# Altium PCB Digital temperature sensor.PcbDoc
Units mm, origin at the board's own origin, x right, y up, seen from the top; angles counter-clockwise.
Board outline 55 x 35 mm, 2 copper layers (Top Layer, Bottom Layer), stack 1.65 mm thick; 7 components, 6 nets, 27 pads, 0 vias.
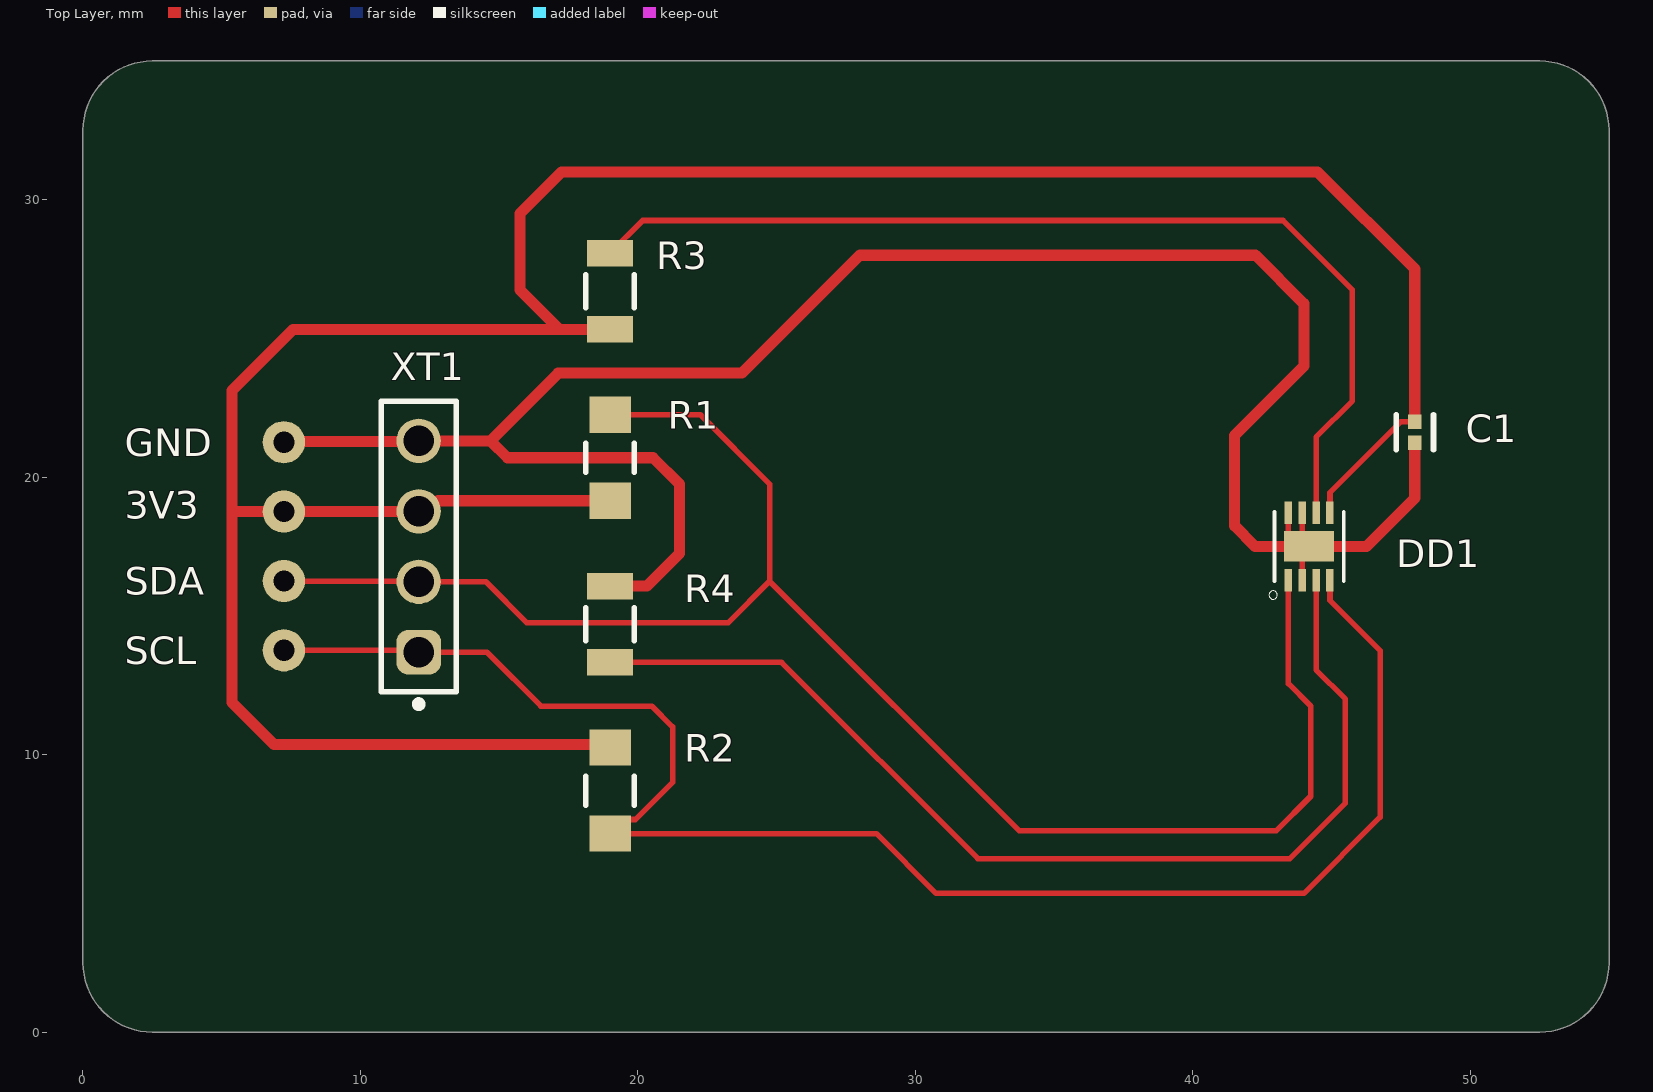
[diagram p0: Top Layer view]
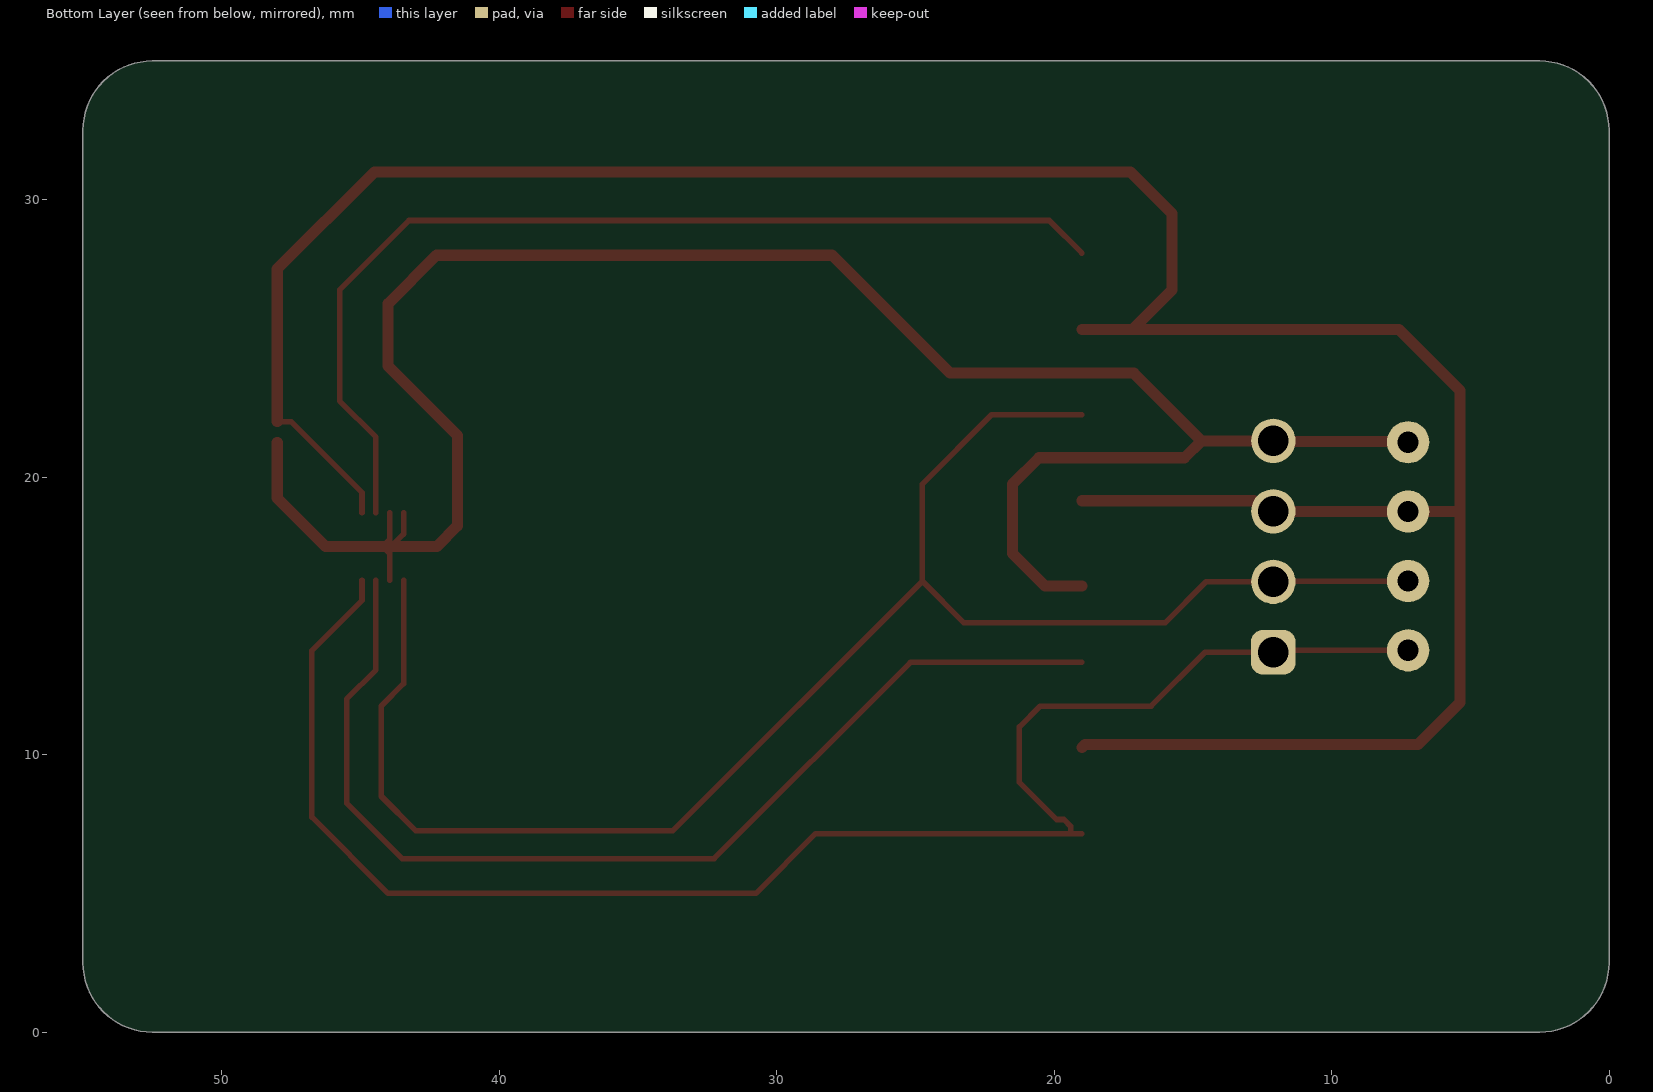
[diagram p1: Bottom Layer view, seen from below]
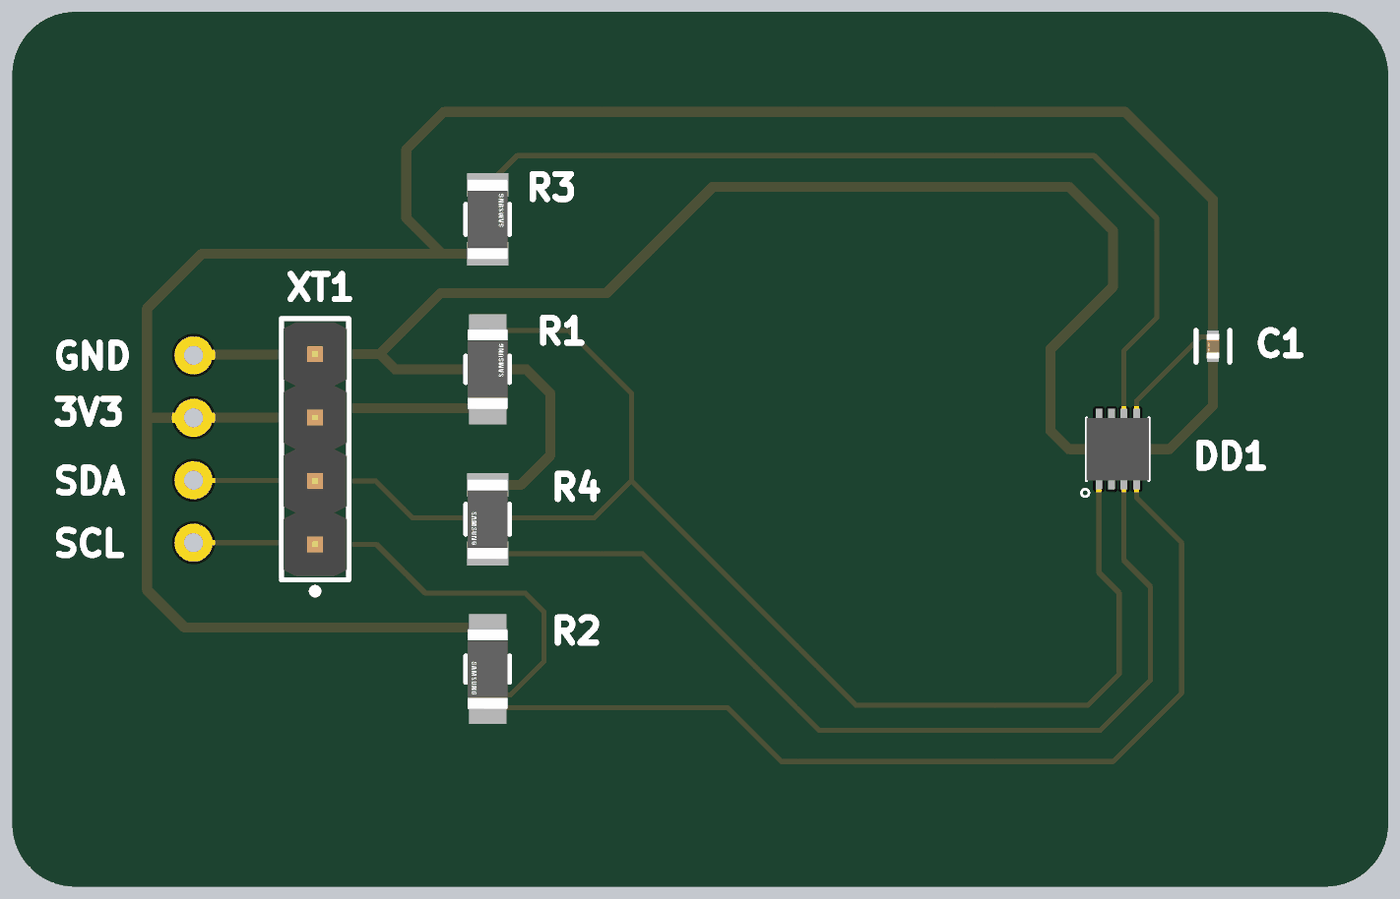
[diagram p2: 3D render of the assembled board from above, using the file's embedded part models]

## Layer stack, top to bottom
Top Solder: solder mask 0.05, Solder Resist, Dk 3.5
Top Layer: signal copper 0.05
Dielectric 1: dielectric 1.55, FR-4, Dk 4.8
Bottom Layer: signal copper 0.05
Bottom Solder: solder mask 0.05, Solder Resist, Dk 3.5

## Board outline
0,2.5 0,32.5 cw(c2.5,32.5) 2.5,35 52.5,35 cw(c52.5,32.5) 55,32.5 55,2.5 cw(c52.5,2.5) 52.5,0 2.5,0 cw(c2.5,2.5)

## Design rules (kind name [scope] priority, off if disabled: settings)
Clearance [All] p1: gap=0.15 ignorepadtopadclearanceinfootprint=FALSE
PolygonConnect [All] p1: connectstyle=Relief reliefconductorwidth=0.254 reliefentries=4 polygonreliefangle="90 Angle" airgapwidth=0.254
RoutingVias [All] p1: holewidth=0.6 width=1 viastyle="Through Hole" minholewidth=0.4 minwidth=0.8 maxholewidth=5 maxwidth=6
SolderMaskExpansion [All] p1: expansion=0.102 istentingtop=FALSE
SupplyNets "Schematic Supply Nets_1" [InNet('3V3')] p1: voltage=0.000
SupplyNets "Schematic Supply Nets" [InNet('GND')] p2: voltage=0.000
Width [All] p1: maxlimit=2 minlimit=0.2 preferedwidth=0.4
30 further rules are at their usual default settings.

## Components (designator, comment, footprint, x,y, rotation, side; value= is the part's Value field where it differs from the comment)
C1 "100nF" FP-CL548-IPC_C 48,21.621 r270 top
DD1 "STS-30-DIS" SON50P250X250X100-9N 44.193,17.502 r90 top (schematic designator U1)
R1 "1206 4.7kΩ 0.25W" FP-RC3216-MFG 19,20.7 r90 top (schematic designator R2)
R2 "1206 4.7kΩ 0.25W" FP-RC3216-MFG 19,8.7 r270 top (schematic designator R3)
R3 "1206 10kΩ 0.25W" FP-RC3216-IPC_C 19,26.7 r90 top (schematic designator R1)
R4 "1206 10kΩ 0.25W" FP-RC3216-IPC_C 19,14.7 r270 top
XT1 "61300411121" 61300411121 12.1,17.5 r90 top (schematic designator P1)

## Footprints (in the part's own frame and the unit in brackets; to place one, negate y for a bottom-side part, rotate by r counter-clockwise, add the part's x,y. Pads: shape width x height; smd on the part's side, far side on the other; paste and mask are expansions set on the pad)
61300411121 [mm] "Pin Header, pitch 2.54 mm, THT, Vertical, single row, 4p"
  rrect50% 1.6x1.6 hole 1.1: 1(-3.81,0)
  round 1.6 hole 1.1: 2(-1.27,0) 3(1.27,0) 4(3.81,0)
  silkscreen extent -5.8,-1.35 5.23,1.35, body extent -5.08,-1.27 5.08,1.27, height 8.57
FP-CL548-IPC_C [mm]
  rect 0.515x0.472 smd paste+0 mask+0: 1(-0.379,0) 2(0.379,0)
  silkscreen extent -0.64,-0.67 0.64,0.67, body extent -0.74,-0.38 0.74,0.38, height 0.25
FP-RC3216-IPC_C [mm]
  rect 0.955x1.658 smd paste+0 mask+0: 1(-1.376,0) 2(1.376,0)
  silkscreen extent -0.6,-0.87 0.6,0.88, body extent -1.95,-0.97 1.95,0.97, height 0.25
FP-RC3216-MFG [mm]
  rect 1.3x1.5 smd paste+0 mask+0: 1(-1.55,0) 2(1.55,0)
  silkscreen extent -0.52,-0.87 0.52,0.88, body extent -2.3,-0.97 2.3,0.97, height 0.25
SON50P250X250X100-9N [mm]
  rect 0.81x0.27 smd: 1(-1.21,0.75) 2(-1.21,0.25) 3(-1.21,-0.25) 4(-1.21,-0.75) 5(1.21,-0.75) 6(1.21,-0.25) 7(1.21,0.25) 8(1.21,0.75)
  rect 1.1x1.8 smd paste-2: 9(0,0)
  silkscreen extent -1.9,-1.25 1.25,1.45, body extent -1.25,-1.25 1.25,1.25, height 0.9

## Part data
C1: library part CMP-13271-000318-1, "Cap Ceramic 100nF 16V X7R ±10% SMD 0402 +125°C Paper T/R", Case/Package=0402, Dielectric=X7R, Max Operating Temperature=125°C, Min Operating Temperature=-55°C, Package Quantity=50000, Tolerance=10%, Voltage=16V, Capacitance=100nF, Depth=0.5mm, Height=0.5mm, Lead Free="Lead Free", Length=1mm, Mount="Surface Mount", Packaging="Tape and Reel", Radiation Hardening=No, Thickness=0.022inch, Voltage Rating=16V, Voltage Rating (DC)=16V, Width=0.02inch
R1 R2: library part CMP-13261-005727-1, "Res Thick Film 1206 4.7kΩ 1% 0.25W ±100ppm/°C Molded SMD T/R", Case Code (Imperial)=1206, Case Code (Metric)=3216, Max Operating Temperature=155°C, Max Power Dissipation=250mW, Min Operating Temperature=-55°C, Resistance=4.7kR, Temperature Coefficient=100ppm/°C, Tolerance=1%, Voltage Rating (DC)=200V, Case/Package=1206, Composition="Thick Film", Contact Plating=Tin, Depth=1.6mm, Features="Moisture Resistant", Height=0.026inch, Lead Free="Lead Free", Length=0.126inch, Military Standard=Not, Number of Terminations=2, Packaging="Tape and Reel", Radiation Hardening=No, Width=0.063inch
R3 R4: library part CMP-13261-005388-1, "Res Thick Film 1206 10kΩ 5% 0.25W ±100ppm/°C Molded SMD T/R", Case Code (Imperial)=1206, Case Code (Metric)=3216, Max Operating Temperature=155°C, Max Power Dissipation=250mW, Min Operating Temperature=-55°C, Resistance=10kR, Temperature Coefficient=100ppm/°C, Tolerance=5%, Voltage Rating (DC)=200V, Case/Package=1206, Composition="Thick Film", Contact Plating=Tin, Depth=1.6mm, Features="Moisture Resistant", Height=0.026inch, Lead Free="Lead Free", Length=0.126inch, Military Standard=Not, Number of Terminations=2, Packaging="Tape and Reel", Radiation Hardening=No, Width=0.063inch
XT1: library part CMP-1502-01064-3, Color=Black, Contact Resistance=20mΩ, Current Rating=3A, Max Operating Temperature=105°C, Min Operating Temperature=-40°C, Operating Supply Voltage=250V, Connector Type="Male Pin", Contact Material=Copper, Contact Mating Length=5.9944mm, Contact Plating=Gold, Gender=Male, Height=8.89mm, Lead Free="Lead Free", Lead Pitch=2.54mm, Mount="Through Hole", NexarPartId=32855522, Number of Contacts=4, Number of Pins=4, Number of Positions=4, Number of Rows=1, Orientation=Vertical, Packaging=Bulk, Pitch=2.54mm, REACH SVHC=Unknown, RoHS=Compliant, Termination=Solder, Voltage Rating=250V

## Free pads (board coordinates)
  round 1.524 hole 0.762: 5(7.24,21.26) 6(7.24,18.76) 7(7.24,16.26) 8(7.24,13.76)

## Nets (pads, with @x,y where several pads share a name; then routed paths per layer and width w, separated by ;. In a path a pad name is that pad's centre, name@x,y a point inside that pad or via, vN(x,y) a via of type N, cw(c..) or ccw(c..) an arc to the next point about the centre after c; other vN are vias at no path point)
3V3: C1.1 DD1.5 pad.6 R1.1 R2.1 R3.1 XT1.3 | length 103.4
  Top Layer w0.2: DD1.5 44.943,19.443 47.5,22 C1.1
  Top Layer w0.4: R2.1 18.884,10.366 6.884,10.366 5.375,11.875 5.375,18.875 ; R1.1 12.805,19.15 12.425,18.77 XT1.3 12.095,18.765 7.245,18.765 pad.6 5.49,18.76 5.375,18.875 ; R3.1 18.648,25.324 17.176,25.324 ; C1.1 48,27.5 44.5,31 17.25,31 15.75,29.5 15.75,26.75 17.176,25.324 ; 5.375,18.875 5.375,23.125 7.574,25.324 17.176,25.324
GND: C1.2 DD1.2 DD1.7 DD1.8 DD1.9 pad.5 R4.1 XT1.4 | length 75.8
  Top Layer w0.2: DD1.8 43.443,17.952 DD1.9@43.893,17.502 ; DD1.2 43.943,17.252 DD1.9 43.943,17.752 DD1.7
  Top Layer w0.4: pad.5 7.265,21.285 12.075,21.285 XT1.4 14.69,21.31 ; R4.1 20.326,16.076 21.5,17.25 21.5,19.75 20.55,20.7 15.3,20.7 14.69,21.31 ; C1.2 48,19.25 46.252,17.502 DD1.9 43.893,17.502 42.248,17.502 41.5,18.25 41.5,21.5 44,24 44,26.25 42.25,28 28,28 23.75,23.75 17.13,23.75 14.69,21.31
NetP1_1: DD1.1 pad.7 R1.2 XT1.2 | length 60.9
  Top Layer w0.2: pad.7 7.255,16.245 12.085,16.245 XT1.2 14.52,16.23 16,14.75 23.25,14.75 24.75,16.25 ; R1.2 22.25,22.25 24.75,19.75 24.75,16.25 ; DD1.1 43.443,12.557 44.25,11.75 44.25,8.5 43,7.25 33.75,7.25 24.75,16.25
NetP1_2: DD1.4 pad.8 R2.2 XT1.1 | length 59
  Top Layer w0.2: pad.8 12.03,13.76 XT1.1 14.56,13.69 16.5,11.75 20.5,11.75 21.25,11 21.25,9 19.912,7.662 19.65,7.662 19.4,7.412 R2.2@19.4,7.15 ; R2.2 R2.2@19.4,7.15 ; DD1.4 44.943,15.557 46.75,13.75 46.75,7.75 44,5 30.75,5 28.6,7.15 19.65,7.15 R2.2@19.4,7.15
NetR1_2: DD1.6 R3.2 | length 36.9
  Top Layer w0.2: R3.2 20.174,29.25 43.25,29.25 45.75,26.75 45.75,22.75 44.443,21.443 DD1.6
NetR4_2: DD1.3 R4.2 | length 38.7
  Top Layer w0.2: R4.2 25.176,13.324 32.25,6.25 43.5,6.25 45.5,8.25 45.5,12 44.443,13.057 DD1.3

## Silkscreen, mask and mechanical layers (free items; w line width, h text height)
Top Overlay:
  text "GND" at 1.504,20.754 h1
  text "3V3" at 1.504,18.504 h1
  text "SDA" at 1.504,15.754 h1
  text "SCL" at 1.504,13.254 h1
Route Tool Path:
  lines w3: 41.5,10 35,10 35,25 41.5,25